# Altium PCB TemperatureSensorBlockPCB.PcbDoc
Units mil, origin at the board's own origin, x right, y up, seen from the top; angles counter-clockwise.
Board outline 6000 x 6000 mil, 2 copper layers (Top Layer, Bottom Layer); 74 components, 43 nets, 214 pads, 28 vias.
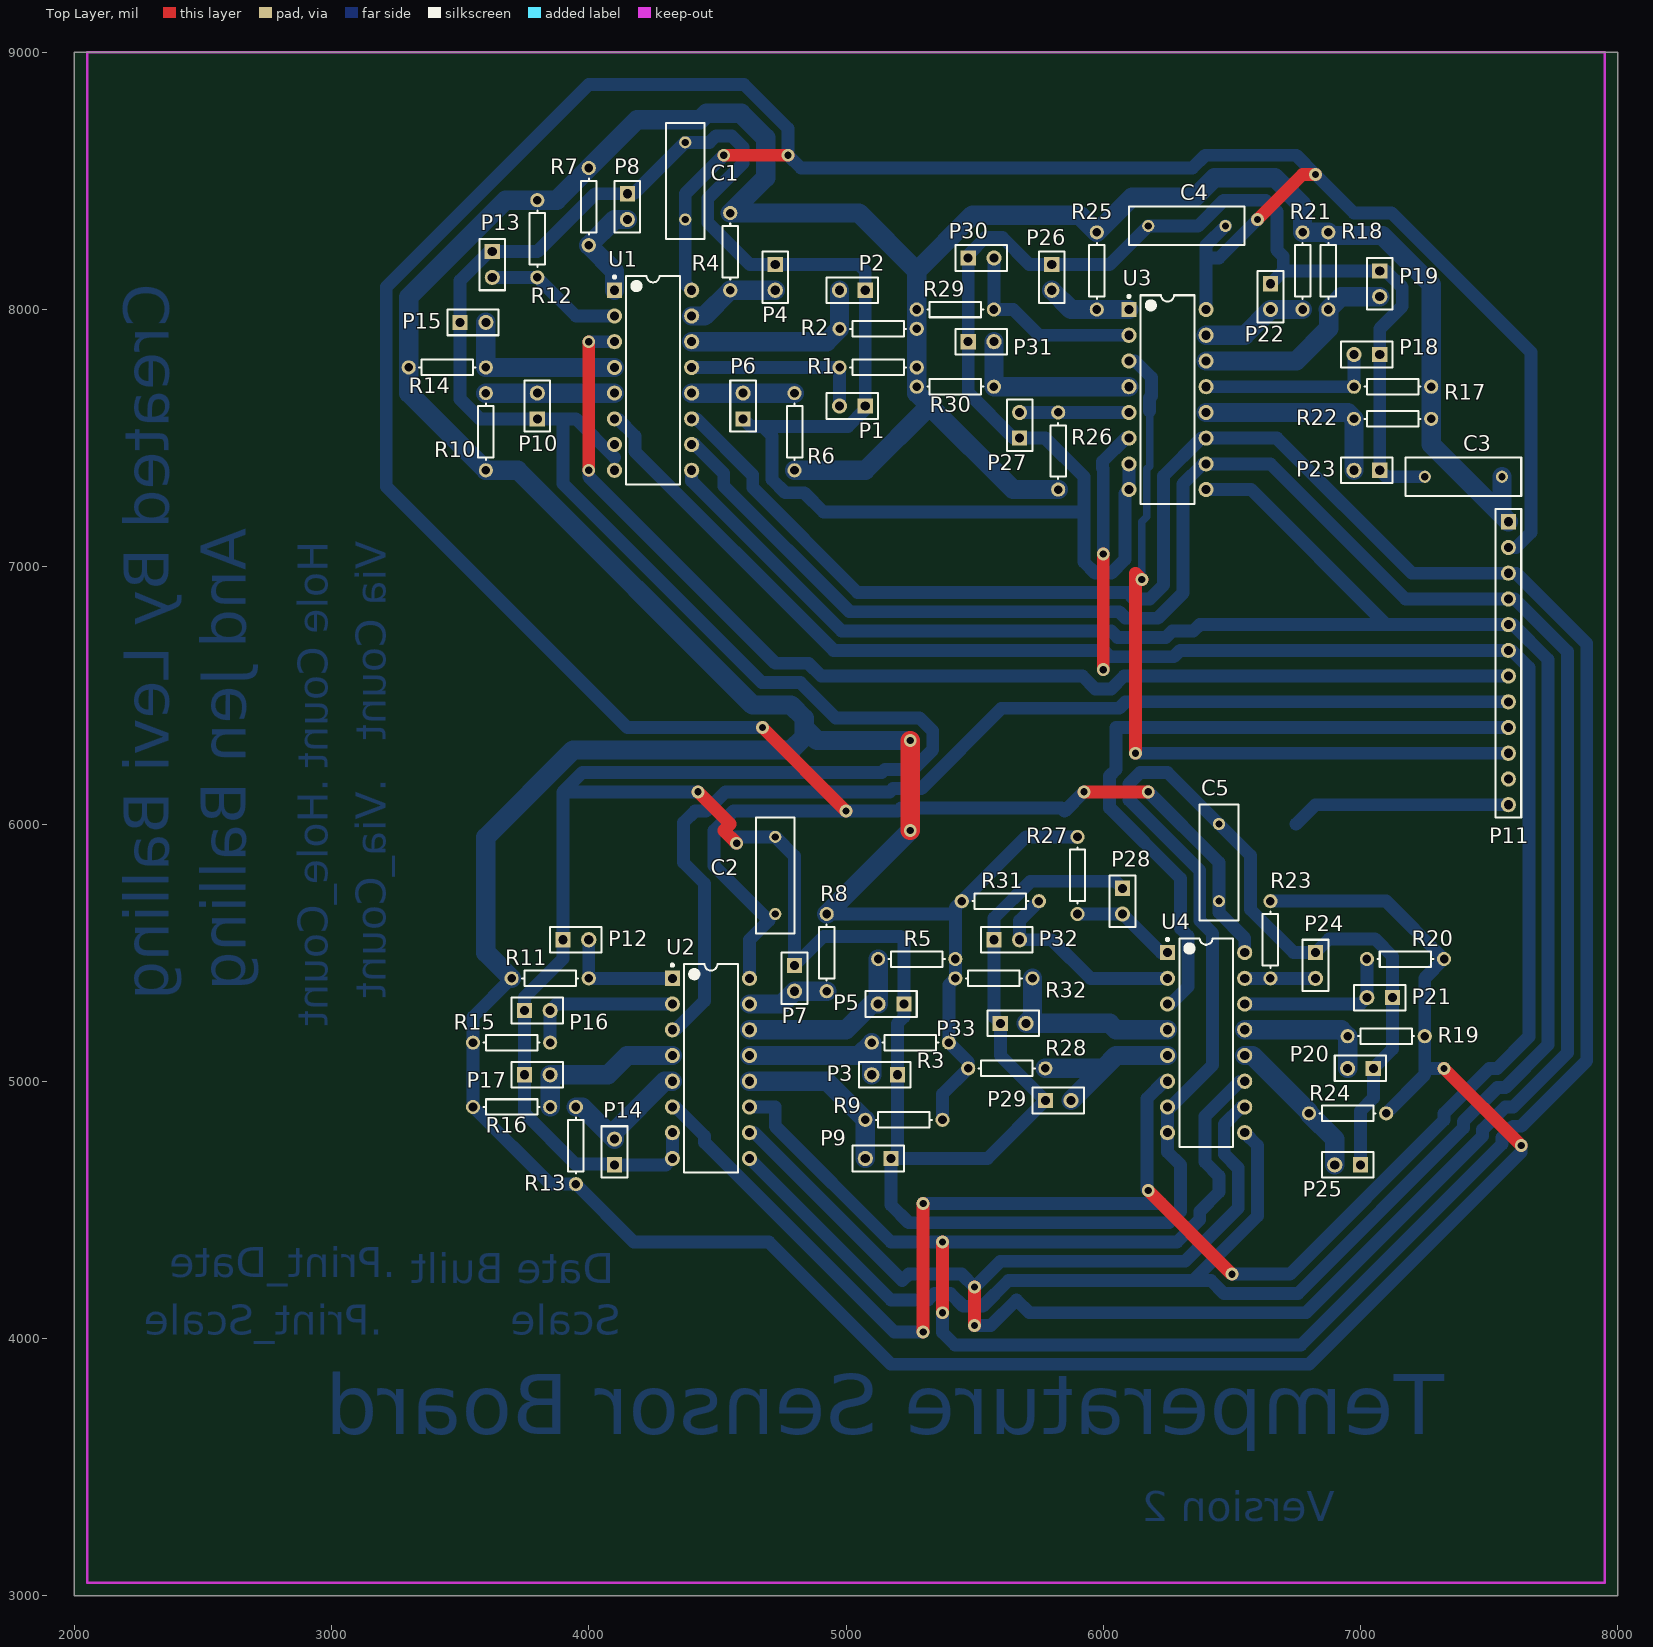
[diagram p0: Top Layer view]
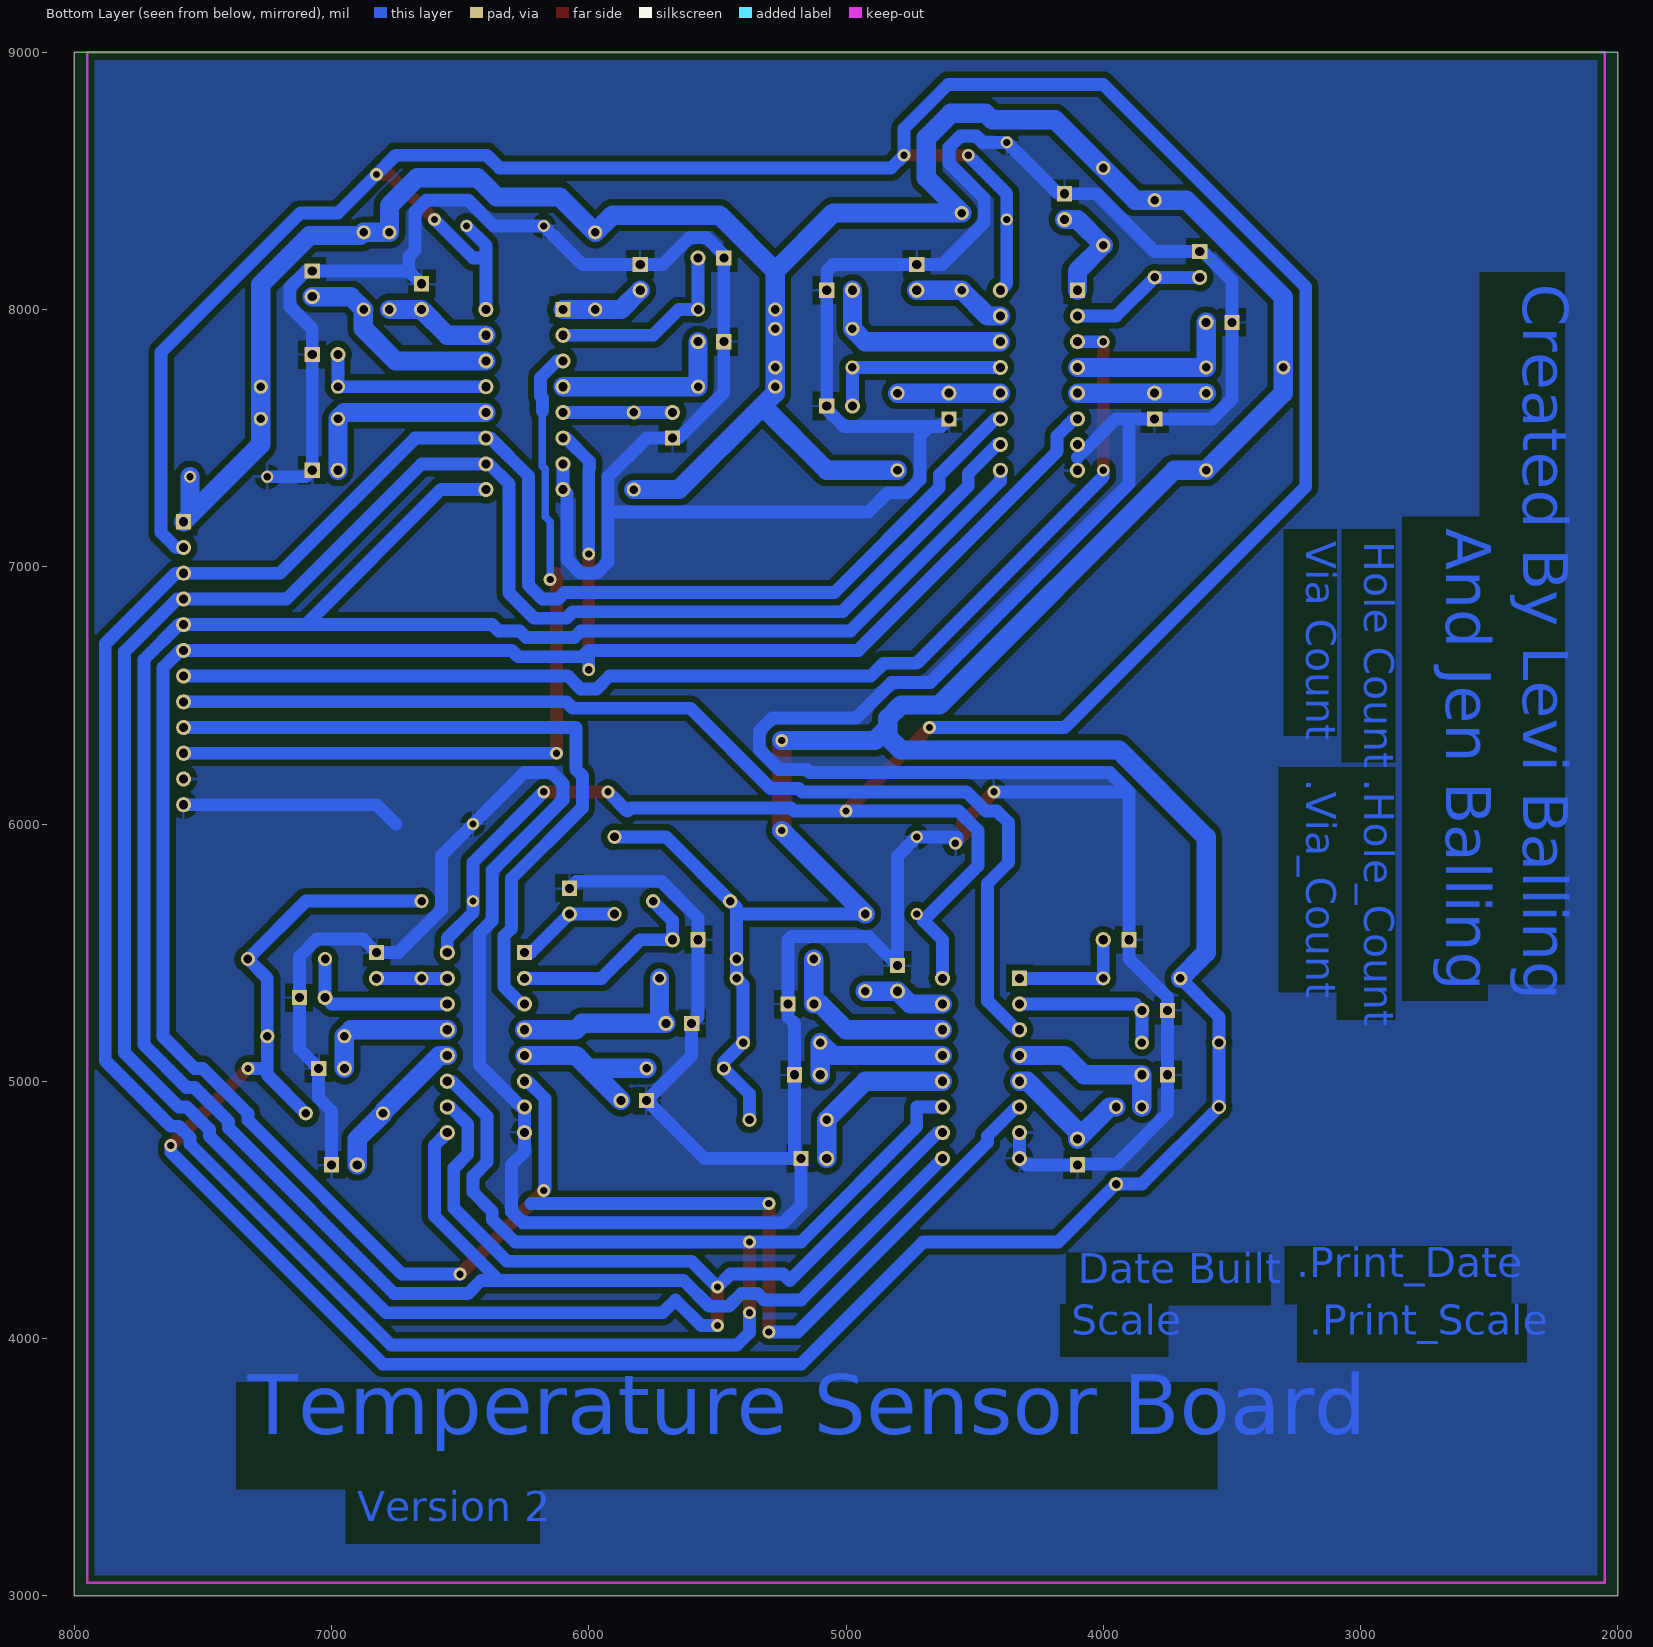
[diagram p1: Bottom Layer view, seen from below]

## Layer stack, top to bottom
Top Layer: signal copper 1.4
Dielectric: dielectric 12.6, FR-4, Dk 4.8
Bottom Layer: signal copper 1.4

## Board outline
2000,3000 8000,3000 8000,9000 2000,9000

## Design rules (kind name [scope] priority, off if disabled: settings)
Clearance [All] p1: gap=25
PolygonConnect [All] p1: connectstyle=Relief reliefconductorwidth=10 reliefentries=4 polygonreliefangle="90 Angle"
RoomDefinition TemperatureSensorBlock [InComponentClass('TemperatureSensorBlock')] p1: confinementstyle=ConfineIn formatcopy=TRUE lockcomponents=FALSE outline 2050,9000 7950,9000 7950,3050 2050,3050
RoutingVias [All] p1: holewidth=32 width=62 viastyle="Through Hole" minholewidth=28 minwidth=50 maxholewidth=28 maxwidth=50
SilkscreenOverComponentPads [All] p1: minsilkscreentomaskgap=10
SolderMaskExpansion [All] p1: expansion=4
Width [All] p1: maxlimit=100 minlimit=25 preferedwidth=25 minimp=50.000000 maximp=50.000000 favimp=50.000000
27 further rules are at their usual default settings.

## Classes and differential pairs
component class TemperatureSensorBlock: C1 C2 C3 C4 P1 P2 P3 P4 P5 P6 P7 P8 P9 P10 P11 P12 P14 P15 P16 P17 P18 P19 P21 P22 P23 P25 P26 P27 P29 P30 P31 P33 R1 R2 R3 R4 R5 R6 R7 R8 R9 R10 R11 R12 R13 R14 R15 R16 R17 R18 R20 R21 R22 R24 R25 R26 R28 R29 R30 R32 U1 U2 U3

## Components (designator, comment, footprint, x,y, rotation, side; value= is the part's Value field where it differs from the comment)
C1 "Cap" RAD-0.3 4375,8500 r270 top
C2 "Cap" RAD-0.3 4725,5800 r270 top
C3 "Cap" RAD-0.3 7400,7350 r0 top
C4 "Cap" RAD-0.3 6325,8325 r0 top
C5 "Cap" RAD-0.3 6450,5850 r270 top
P1 "Header 2" HDR1X2 5075,7625 r180 top
P2 "Header 2" HDR1X2 5075,8075 r180 top
P3 "Header 2" HDR1X2 5200,5025 r180 top
P4 "Header 2" HDR1X2 4725,8175 r270 top
P5 "Header 2" HDR1X2 5225,5300 r180 top
P6 "Header 2" HDR1X2 4600,7575 r90 top
P7 "Header 2" HDR1X2 4800,5450 r270 top
P8 "Header 2" HDR1X2 4150,8450 r270 top
P9 "Header 2" HDR1X2 5175,4700 r180 top
P10 "Header 2" HDR1X2 3800,7575 r90 top
P11 "Header 12" HDR1X12 7575,7175 r270 top
P12 "Header 2" HDR1X2 3900,5550 r0 top
P13 "Header 2" HDR1X2 3625,8225 r270 top
P14 "Header 2" HDR1X2 4100,4675 r90 top
P15 "Header 2" HDR1X2 3500,7950 r0 top
P16 "Header 2" HDR1X2 3750,5275 r0 top
P17 "Header 2" HDR1X2 3750,5025 r0 top
P18 "Header 2" HDR1X2 7075,7825 r180 top
P19 "Header 2" HDR1X2 7075,8150 r270 top
P20 "Header 2" HDR1X2 7050,5050 r180 top
P21 "Header 2" HDR1X2 7125,5325 r180 top
P22 "Header 2" HDR1X2 6650,8100 r270 top
P23 "Header 2" HDR1X2 7075,7375 r180 top
P24 "Header 2" HDR1X2 6825,5500 r270 top
P25 "Header 2" HDR1X2 7000,4675 r180 top
P26 "Header 2" HDR1X2 5800,8175 r270 top
P27 "Header 2" HDR1X2 5675,7500 r90 top
P28 "Header 2" HDR1X2 6075,5750 r270 top
P29 "Header 2" HDR1X2 5775,4925 r0 top
P30 "Header 2" HDR1X2 5475,8200 r0 top
P31 "Header 2" HDR1X2 5475,7875 r0 top
P32 "Header 2" HDR1X2 5575,5550 r0 top
P33 "Header 2" HDR1X2 5600,5225 r0 top
R1 "Res1" AXIAL-0.3 5125,7775 r180 top
R2 "Res1" AXIAL-0.3 5125,7925 r180 top
R3 "Res1" AXIAL-0.3 5250,5150 r180 top
R4 "Res1" AXIAL-0.3 4550,8225 r270 top
R5 "Res1" AXIAL-0.3 5275,5475 r180 top
R6 "Res1" AXIAL-0.3 4800,7525 r90 top
R7 "Res1" AXIAL-0.3 4000,8400 r270 top
R8 "Res1" AXIAL-0.3 4925,5500 r270 top
R9 "Res1" AXIAL-0.3 5225,4850 r180 top
R10 "Res1" AXIAL-0.3 3600,7525 r90 top
R11 "Res1" AXIAL-0.3 3850,5400 r0 top
R12 "Res1" AXIAL-0.3 3800,8275 r270 top
R13 "Res1" AXIAL-0.3 3950,4750 r90 top
R14 "Res1" AXIAL-0.3 3450,7775 r0 top
R15 "Res1" AXIAL-0.3 3700,5150 r0 top
R16 "Res1" AXIAL-0.3 3700,4900 r0 top
R17 "Res1" AXIAL-0.3 7125,7700 r180 top
R18 "Res1" AXIAL-0.3 6875,8150 r270 top
R19 "Res1" AXIAL-0.3 7100,5175 r180 top
R20 "Res1" AXIAL-0.3 7175,5475 r180 top
R21 "Res1" AXIAL-0.3 6775,8150 r270 top
R22 "Res1" AXIAL-0.3 7125,7575 r180 top
R23 "Res1" AXIAL-0.3 6650,5550 r270 top
R24 "Res1" AXIAL-0.3 6950,4875 r180 top
R25 "Res1" AXIAL-0.3 5975,8150 r270 top
R26 "Res1" AXIAL-0.3 5825,7450 r90 top
R27 "Res1" AXIAL-0.3 5900,5800 r270 top
R28 "Res1" AXIAL-0.3 5625,5050 r0 top
R29 "Res1" AXIAL-0.3 5425,8000 r0 top
R30 "Res1" AXIAL-0.3 5425,7700 r0 top
R31 "Res1" AXIAL-0.3 5600,5700 r0 top
R32 "Res1" AXIAL-0.3 5575,5400 r0 top
U1 "CD4051BCN" N16E 4250,7725 r0 top
U2 "CD4051BCN" N16E 4475,5050 r0 top
U3 "CD4051BCN" N16E 6250,7650 r0 top
U4 "CD4051BCN" N16E 6400,5150 r0 top

## Footprints (in the part's own frame and the unit in brackets; to place one, negate y for a bottom-side part, rotate by r counter-clockwise, add the part's x,y. Pads: shape width x height; smd on the part's side, far side on the other; paste and mask are expansions set on the pad)
AXIAL-0.3 [mm] "Axial Device, Thru-Hole; 2 Leads; 0.3 in Pin Spacing"
  round 1.4 hole 0.85: 1(-3.81,0) 2(3.81,0)
  silkscreen extent -2.77,-0.76 2.77,0.76
HDR1X2 [mm] "Connector; Header; 2 Position"
  rect 1.5x1.5 hole 0.9: 1(0,0)
  round 1.5 hole 0.9: 2(2.54,0)
  silkscreen extent -1.27,-1.27 3.81,1.27
HDR1X12 [mm] "Connector; Header; 12 Position"
  rect 1.5x1.5 hole 0.9: 1(0,0)
  round 1.5 hole 0.9: 2(2.54,0) 3(5.08,0) 4(7.62,0) 5(10.16,0) 6(12.7,0) 7(15.24,0) 8(17.78,0) 9(20.32,0) 10(22.86,0) 11(25.4,0) 12(27.94,0)
  silkscreen extent -1.27,-1.27 29.21,1.27
N16E [mm] "DIP, 16-Leads, Row Spacing 7.62mm, Pitch 2.54mm, Body 19.3x6.35mm"
  rect 1.5x1.5 hole 0.9: 1(-3.81,8.89)
  round 1.5 hole 0.9: 2(-3.81,6.35) 3(-3.81,3.81) 4(-3.81,1.27) 5(-3.81,-1.27) 6(-3.81,-3.81) 7(-3.81,-6.35) 8(-3.81,-8.89) 9(3.81,-8.89) 10(3.81,-6.35) 11(3.81,-3.81) 12(3.81,-1.27) 13(3.81,1.27) 14(3.81,3.81) 15(3.81,6.35) 16(3.81,8.89)
  silkscreen extent -3.93,-10.3 2.65,10.31, body extent -3.6,-10.28 3.6,10.28, height 5.08
RAD-0.3 [mm] "Radial Cap, Thru-Hole; 2 Leads; 0.3 in Pin Spacing"
  round 1.2 hole 0.7: 1(-3.81,0) 2(3.81,0)
  silkscreen extent -5.71,-1.91 5.71,1.91

## Part data
C1 C2 C3 C4 C5: "Capacitor"
P1 P2 P3 P4 P5 P6 P7 P8 P9 P10 P12 P13 P14 P15 P16 P17 P18 P19 P20 P21 P22 P23 P24 P25 P26 P27 P28 P29 P30 P31 P32 P33: "Header, 2-Pin"
P11: "Header, 12-Pin"
R1 R2 R3 R4 R5 R6 R7 R8 R9 R10 R11 R12 R13 R14 R15 R16 R17 R18 R19 R20 R21 R22 R23 R24 R25 R26 R27 R28 R29 R30 R31 R32: "Resistor"
U1 U2 U3 U4: "8-Channel Analog Multiplexer/Demultiplexer"

## Via types
v1: diameter 50, hole 28, Top Layer to Bottom Layer, 28 vias

## Nets (pads, with @x,y where several pads share a name; then routed paths per layer and width w, separated by ;. In a path a pad name is that pad's centre, name@x,y a point inside that pad or via, vN(x,y) a via of type N, cw(c..) or ccw(c..) an arc to the next point about the centre after c; other vN are vias at no path point)
+12V: C3.2 P11.1 R1.1 R2.1 R3.1 R4.1 R5.1 R6.1 R7.1 R8.1 R9.1 R10.1 R11.1 R12.1 R13.1 R14.1 R15.1 R16.1 R17.1 R18.1 R19.1 R20.1 R21.1 R22.1 R23.1 R24.1 R25.1 R26.1 R27.1 R28.1 R29.1 R30.1 R31.1 R32.1 | length 23399.4
  Top Layer w50: v1(7325,5050) v1(7625,4750)
  Top Layer w75: v1(5250,5975) v1(5250,6325)
  Bottom Layer w50: R11.1 3550,5250 R15.1 R16.1 3850,4600 R13.1 4175,4375 4700,4375 5175,3900 6800,3900 7625,4725 v1(7625,4750) ; R8.1 5400,5650 ; R9.1 5375,4950 R28.1 5475,5075 R3.1 5400,5375 R32.1 R5.1 5425,5675 R31.1 5700,5950 R27.1 ; R23.1 7100,5700 R20.1 7250,5400 R19.1 7250,5025 R24.1 ; 7275,5050 v1(7325,5050)
  Bottom Layer w75: R11.1 3600,5500 3600,5948.74 3938.76,6287.5 4786.24,6287.5 4837.5,6338.76 4837.5,6375 ; R6.1 5075,7375 5325,7625 ; R8.1 v1(5250,5975) ; v1(5250,6325) 4887.5,6325 4837.5,6375 ; R26.1 5650,7300 5325,7625 ; C3.2 P11.1@7550,7200 ; P11.1 P11.1@7550,7200 ; 4837.5,6375 4837.5,6411.24 4786.24,6462.5 4636.24,6462.5 3723.74,7375 R10.1 3300,7675 R14.1 3300,8048.74 3676.26,8425 R12.1 3875,8425 R7.1 4187.5,8737.5 4432.69,8737.5 4457.69,8762.5 4592.31,8762.5 4687.5,8667.31 4687.5,8512.5 R4.1 5050,8375 5275,8150 ; 5275,8150 5492.03,8367.03 5907.97,8367.03 R25.1 6112.5,8437.5 6357.69,8437.5 6432.69,8512.5 6667.31,8512.5 6775,8404.81 R21.1 R18.1 6887.5,8287.5 7084.99,8287.5 7275,8097.49 R17.1 R22.1 7275,7475 P11.1@7550,7200 ; 5275,8150 R29.1 R2.1 R1.1 R30.1 5275,7675 5325,7625
ANALOG_OUT_1: P11.7 U1.3 | length 4562.4
  Top Layer w50: v1(4000,7375) v1(4000,7875)
  Bottom Layer w50: v1(4000,7375) 4000,7350 4725,6625 4853.55,6625 4903.55,6575 5918.93,6575 5968.93,6525 6031.07,6525 6081.07,6575 P11.7 ; v1(4000,7875) U1.3
ANALOG_OUT_2: P11.8 U2.3 | length 4299.6
  Bottom Layer w50: U2.3 4337.47,5200 4450,5312.53 4450,5768.93 4368.57,5850.37 4368.57,6006.07 4412.5,6050 4456.07,6050 4531.07,6125 5170.19,6125 5182.69,6137.5 5292.31,6137.5 5604.81,6450 6062.13,6450 6087.13,6475 P11.8
ANALOG_OUT_3: P11.9 U4.3 | length 2776.7
  Bottom Layer w50: U4.3 6262.47,5300 6329.53,5367.06 6329.53,5564.41 6300,5593.93 6300,5787.87 6025,6062.87 6025,6187.13 6050,6212.13 6050,6375 P11.9
ANALOG_OUT_4: P11.10 U3.3 | length 3101
  Top Layer w50: v1(6125,6275) 6125,6975 v1(6150,6950)
  Bottom Layer w30: v1(6150,6950) 6150,7175 6169.53,7194.53 6169.53,7379.99 6180.47,7390.93 6180.47,7605.47
  Bottom Layer w50: U3.3 6123.74,7800 6187.5,7736.24 6187.5,7663.76 6180.47,7656.73 6180.47,7605.47 ; v1(6125,6275) P11.10
CHANNEL_DEMUX_A: P11.3 U1.11 U2.11 U3.11 U4.11 | length 12319.7
  Top Layer w50: v1(5375,4100) v1(5375,4375)
  Bottom Layer w50: U1.11 4418.53,7575 4637.5,7356.03 4637.5,7307.69 5045.19,6900 6093.93,6900 6118.93,6875 6181.07,6875 6234.53,6928.46 6234.53,7353.06 6381.47,7500 U3.11 6675,7500 7200,6975 P11.3 7605.67,6975 7879.53,6701.14 7879.53,5079.53 7625,4825 7593.93,4825 7550,4781.07 7550,4756.07 6768.93,3975 5423.46,3975 5375,4023.46 v1(5375,4100) ; U2.11 4725,4900 4725,4825 5175,4375 v1(5375,4375) 6287.13,4375 6375,4462.87 6375,4493.93 6450,4568.93 6450,4631.07 6395.47,4685.59 6395.47,4864.01 6531.47,5000 U4.11
CHANNEL_DEMUX_B: P11.4 U1.10 U2.10 U3.10 U4.10 | length 11773.8
  Top Layer w50: v1(5500,4050) v1(5500,4200)
  Bottom Layer w50: U1.10 4412.47,7475 4525,7362.47 4525,7314.12 5014.12,6825 6062.13,6825 6087.13,6800 6212.13,6800 6309.53,6897.4 6309.53,7322 6387.53,7400 U3.10 6650,7400 7175,6875 P11.4 7599.6,6875 7804.53,6670.07 7804.53,5110.59 7593.93,4900 7562.87,4900 7475,4812.13 7475,4787.13 6787.87,4100 5712.87,4100 5662.87,4150 5562.87,4050 v1(5500,4050) ; U2.10 4643.93,4800 5218.93,4225 5243.93,4250 5450,4250 v1(5500,4200) 5500.74,4200 5600.74,4300 6318.2,4300 6525,4506.8 6525,4662.13 6470.47,4716.66 6470.47,4832.94 6537.53,4900 U4.10
CHANNEL_DEMUX_C: P11.5 U1.9 U2.9 U3.9 U4.9 | length 10761.4
  Bottom Layer w50: U1.9 4400,7333.06 4983.06,6750 6031.07,6750 6056.07,6725 6243.2,6725 6268.2,6750 6350,6750 6375,6775 7100,6775 ; U2.9 5175,4150 5318.93,4150 5343.93,4175 5406.07,4175 5456.07,4125 5531.8,4125 5631.8,4225 6418.93,4225 6468.93,4175 6756.8,4175 7400,4818.2 7400,4843.2 7531.8,4975 7562.87,4975 7729.53,5141.66 7729.53,6639.01 7593.53,6775 P11.5 7100,6775 ; 6243.2,4225 6349.26,4225 6600,4475.74 6600,4750 U4.9 ; U3.9 6575,7300 7100,6775
CHANNEL_DEMUX_EN: P11.6 U1.6 U2.6 U3.6 U4.6 | length 11727.9
  Top Layer w50: v1(5300,4025) v1(5300,4525) ; v1(6000,6600) v1(6000,7050) ; v1(6175,4575) v1(6500,4250)
  Bottom Layer w50: U1.6 4112.47,7575 4179.53,7507.94 4179.53,7447.46 4951.99,6675 6000,6675 ; U2.6 4337.47,4900 4450,4787.47 4450,4762.53 5187.53,4025 v1(5300,4025) ; v1(5300,4525) 6225,4525 ; v1(6000,6600) 6000,6675 ; v1(6000,7050) 6000,7381.07 5996.97,7384.1 5996.97,7409.44 6087.53,7500 U3.6 ; v1(6175,4575) 6170.47,4579.53 6170.47,4932.94 6237.53,5000 U4.6 ; v1(6500,4250) 6725.74,4250 7325,4849.26 7325,4874.26 7500.74,5050 7531.8,5050 7654.53,5172.73 7654.53,6607.94 7587.47,6675 P11.6 6299.26,6675 6274.26,6650 6025,6650 6000,6675
GND: C1.1 C2.1 C3.1 C4.1 C5.1 P1.1 P2.1 P3.1 P4.1 P5.1 P6.1 P7.1 P8.1 P9.1 P10.1 P11.11 P11.12 P12.1 P13.1 P14.1 P15.1 P16.1 P17.1 P18.1 P19.1 P20.1 P21.1 P22.1 P23.1 P24.1 P25.1 P26.1 P27.1 P28.1 P29.1 P30.1 P31.1 P32.1 P33.1 U1.7 U1.8 U2.7 U2.8 U3.7 U3.8 U4.7 U4.8 | length 28393.1
  Top Layer w50: v1(4425,6125) 4550,6000 4525,5975 v1(4575,5925)
  Bottom Layer w50: 4100,7425 3950,7575 3900,7575 ; U2.7 U2.8 4300,4675 P14.1 4097.44,4677.56 3948.7,4677.56 3750,4876.26 P17.1 P16.1 3750,5326.26 3900,5476.26 P12.1 3900,6125 ; v1(4425,6125) 3900,6125 ; v1(4575,5925) 4568.93,5931.07 4568.93,5950 C2.1 4800,5875 P7.1 4912.5,5562.5 5212.5,5562.5 5225,5550 P5.1 5225,5250 5200,5225 P3.1 5200,4725 P9.1 ; P6.1 4629.53,7545.47 4675,7545.47 ; P28.1 6047.44,5777.56 5717.87,5777.56 5575,5634.69 P32.1 5575,5250 P33.1 5600,5100 P29.1 5550,4700 P9.1 ; U3.7 U3.8 6085,7285 6085,7028.93 6031.07,6975 5968.93,6975 5925,7018.93 5925,7200 ; P22.1 6700,8150 ; 6750,6000 6825,6075 P11.12 ; P25.1 7000,4884.69 7050,4934.69 P20.1 7125,5125 P21.1 7125,5484.69 7057.13,5552.56 6877.56,5552.56 P24.1 6740.31,5500 6572.44,5667.87 6572.44,5877.56 C5.1 6250,6200 6143.93,6200 6100,6156.07 6100,6093.93 6375,5818.93 6375,5625 6425,5575 6425,5062.53 6262.47,4900 U4.7 U4.8 6250,4725 6300,4675 6300,4493.93 6256.07,4450 5243.93,4450 5175,4518.93 P9.1 ; C3.1 7100,7350 P23.1 P18.1 7075,7925 7162.5,8012.5 7162.5,8086.24 7098.74,8150 P19.1 6700,8150 ; 3900,6125 3975,6200 5139.12,6200 5151.62,6212.5 5261.24,6212.5 5337.5,6288.76 5337.5,6361.24 5286.24,6412.5 4959.99,6412.5 4822.49,6550 4672.49,6550 3900,7322.49 3900,7575 ; 3900,7575 P10.1 3576.26,7575 3500,7651.26 P15.1 3500,8112.47 3612.53,8225 P13.1 3800,8225 4025,8450 P8.1 4175,8450 C1.1 4468.93,8650 4493.93,8675 4556.07,8675 4600,8631.07 4600,8568.93 4462.5,8431.43 4462.5,8338.76 4626.26,8175 P4.1 5050,8175 5075,8150 P2.1 P1.1 5075,7612.53 5007.94,7545.47 4675,7545.47 ; 4675,7545.47 4712.5,7507.97 4712.5,7338.76 4763.76,7287.5 4837.5,7287.5 4912.5,7212.5 5912.5,7212.5 5925,7200 ; 5925,7200 5925,7350 5775,7500 P27.1 5651.26,7500 5475,7676.26 P31.1 P30.1 5475,8212.47 5542.06,8279.53 5607.94,8279.53 5712.47,8175 P26.1 6025,8175 C4.1 6368.93,8325 6468.93,8425 6631.07,8425 6675,8381.07 6675,8231.07 6700,8206.07 6700,8150
NetP1_2: P1.2 R1.2 U1.13 | length 725
  Bottom Layer w50: U1.13 R1.2 P1.2
NetP2_2: P2.2 R2.2 U1.14 | length 745.7
  Bottom Layer w75: U1.14 4925,7875 R2.2 P2.2
NetP3_2: P3.2 R3.2 U2.13 | length 620.7
  Bottom Layer w75: U2.13 5050,5100 R3.2 P3.2
NetP4_2: P4.2 R4.2 U1.15 | length 366.4
  Bottom Layer w75: U1.15 4450,7975 R4.2 P4.2
NetP5_2: P5.2 R5.2 U2.14 | length 716.4
  Bottom Layer w75: U2.14 5000,5200 5100,5300 P5.2 R5.2
NetP6_2: P6.2 R6.2 U1.12 | length 400
  Bottom Layer w75: U1.12 P6.2 R6.2
NetP7_2: P7.2 R8.2 U2.15 | length 320.7
  Bottom Layer w75: U2.15 4750,5300 P7.2 R8.2
NetP8_2: P8.2 R7.2 U1.1 | length 407.8
  Bottom Layer w75: U1.1 4100,8150 R7.2 4100,8350 P8.2
NetP9_2: P9.2 R9.2 U2.12 | length 662.1
  Bottom Layer w75: U2.12 4925,5000 R9.2 P9.2
NetP10_2: P10.2 R10.2 U1.5 | length 500
  Bottom Layer w75: R10.2 P10.2 U1.5
NetP12_2: P12.2 R11.2 U2.1 | length 475
  Bottom Layer w50: P12.2 R11.2 U2.1
NetP13_2: P13.2 R12.2 U1.2 | length 537.1
  Bottom Layer w50: P13.2 R12.2 3950,7975 U1.2
NetP14_2: P14.2 R13.2 U2.5 | length 537.6
  Bottom Layer w75: R13.2 3975,4900 P14.2 4100,4805.15 4294.85,5000 U2.5
NetP15_2: P15.2 R14.2 U1.4 | length 675
  Bottom Layer w75: P15.2 R14.2 U1.4
NetP16_2: P16.2 R15.2 U2.2 | length 610.4
  Bottom Layer w50: R15.2 P16.2 3875,5300 U2.2
NetP17_2: P17.2 R16.2 U2.4 | length 631.1
  Bottom Layer w75: R16.2 P17.2 4075,5025 4150,5100 U2.4
NetP18_2: P18.2 R17.2 U3.13 | length 700
  Bottom Layer w50: U3.13 R17.2 P18.2
NetP19_2: P19.2 R18.2 U3.14 | length 823.5
  Bottom Layer w75: U3.14 6750,7800 6876.18,7926.18 6876.18,7998.82 R18.2 6925,8050 P19.2
NetP20_2: P20.2 R19.2 U4.13 | length 535.4
  Bottom Layer w75: U4.13 6925,5200 R19.2 P20.2
NetP21_2: P21.2 R20.2 U4.14 | length 635.4
  Bottom Layer w50: U4.14 7000,5300 P21.2 R20.2
NetP22_2: P22.2 R21.2 U3.15 | length 416.4
  Bottom Layer w75: U3.15 6550,7900 P22.2 R21.2
NetP23_2: P23.2 R22.2 U3.12 | length 785.4
  Bottom Layer w75: U3.12 6950,7600 R22.2 P23.2
NetP24_2: P24.2 R23.2 U4.15 | length 275
  Bottom Layer w50: U4.15 R23.2 P24.2
NetP25_2: P25.2 R24.2 U4.12 | length 587.6
  Bottom Layer w75: U4.12 6580.15,5100 6800,4880.15 R24.2 6900,4775 P25.2
NetP26_2: P26.2 R25.2 U3.1 | length 331.1
  Bottom Layer w75: P26.2 5875,8000 R25.2 U3.1
NetP27_2: P27.2 R26.2 U3.5 | length 425
  Bottom Layer w50: P27.2 R26.2 U3.5
NetP28_2: P28.2 R27.2 U4.1 | length 412.1
  Bottom Layer w50: R27.2 P28.2 6225,5500 U4.1
NetP29_2: P29.2 R28.2 U4.5 | length 672.5
  Bottom Layer w75: R28.2 6000,5050 ; P29.2 6000,5050 ; U4.5 6050,5100 6000,5050
NetP30_2: P30.2 R29.2 U3.2 | length 766.4
  Bottom Layer w50: P30.2 R29.2 5650,8000 5750,7900 U3.2
NetP31_2: P31.2 R30.2 U3.4 | length 700
  Bottom Layer w75: P31.2 R30.2 U3.4
NetP32_2: P32.2 R31.2 U4.2 | length 818.2
  Bottom Layer w50: R31.2 5675,5625 P32.2 5800,5550 5950,5400 U4.2
NetP33_2: P33.2 R32.2 U4.4 | length 745.7
  Bottom Layer w75: R32.2 5725,5250 P33.2 6025,5225 6050,5200 U4.4
VCC: C1.2 C2.2 C4.2 C5.2 P11.2 U1.16 U2.16 U3.16 U4.16 | length 14205.5
  Top Layer w50: v1(4525,8600) v1(4775,8600) ; v1(4675,6375) v1(5000,6050) ; v1(5925,6125) v1(6175,6125) ; v1(6600,8350) 6775,8525 v1(6825,8525)
  Bottom Layer w50: U1.16 4375,8100 C1.2 4375,8450 v1(4525,8600) ; U2.16 4625,5550 4700,5625 4487.13,5837.87 4487.13,5975 4562.13,6050 v1(5000,6050) 5201.26,6050 5213.76,6062.5 5837.5,6062.5 5850,6050 v1(5925,6125) ; v1(4675,6375) 4150,6375 3212.5,7312.5 3212.5,8087.5 4000,8875 4603.55,8875 4775,8703.55 v1(4775,8600) 4825,8550 6346.45,8550 6396.45,8600 6750,8600 v1(6825,8525) 6975,8375 7121.23,8375 7662.5,7833.73 7662.5,7132.73 7604.77,7075 P11.2 ; v1(6175,6125) 6450,5850 C5.2 6450,5656.07 6550,5556.07 U4.16 ; U3.16 6400,8200 ; C4.2 6400,8250 6400,8200 ; v1(6600,8350) 6450,8200 6400,8200

## Polygon pours and split planes (outlines as drawn)
GND on Bottom Layer "GndPlane" (solid, pour order 3): 7950,9000 2050,9000 2050,3050 7925,3050 7950,3075

## Keep-outs
Keep-Out Layer:
  lines w10: 2050,3050 2050,9000 7950,9000 7950,3050 2050,3050

## Other copper
Bottom Layer:
  text "Created By Levi Balling" at 2425,8100 h300 r90
  text "And Jen Balling" at 2725,7150 h300 r90
  text "Hole Count" at 3025,7100 h200 r90
  text "Via Count" at 3250,7100 h200 r90
  text ".Hole_Count" at 3025,6175 h200 r90
  text ".Via_Count" at 3250,6175 h200 r90
  text ".Print_Date" at 3250,4200 h200
  text "Date Built" at 4100,4175 h200
  text ".Print_Scale" at 3200,3975 h200
  text "Scale" at 4125,3975 h200
  text "Temperature Sensor Board" at 7325,3550 h400
  text "Version 2" at 6900,3250 h200

## Silkscreen, mask and mechanical layers (free items; w line width, h text height)
Drill Drawing:
  text ".LEGEND" at 8200,3200 h60
  text "Drill Drawing." at 8200,3100 h60

## Dimensions
2050,3050 to 2050,9000 on Mechanical 1
2050,3050 to 7950,3050 on Mechanical 1